# Altium PCB SuperFin GPIO Apps Board#1.PcbDoc
Units mil, origin at the board's own origin, x right, y up, seen from the top; angles counter-clockwise.
Board outline 3149.61 x 1673.23 mil, 2 copper layers (Top Layer, Bottom Layer); 6 components, 0 nets, 158 pads, 0 vias.
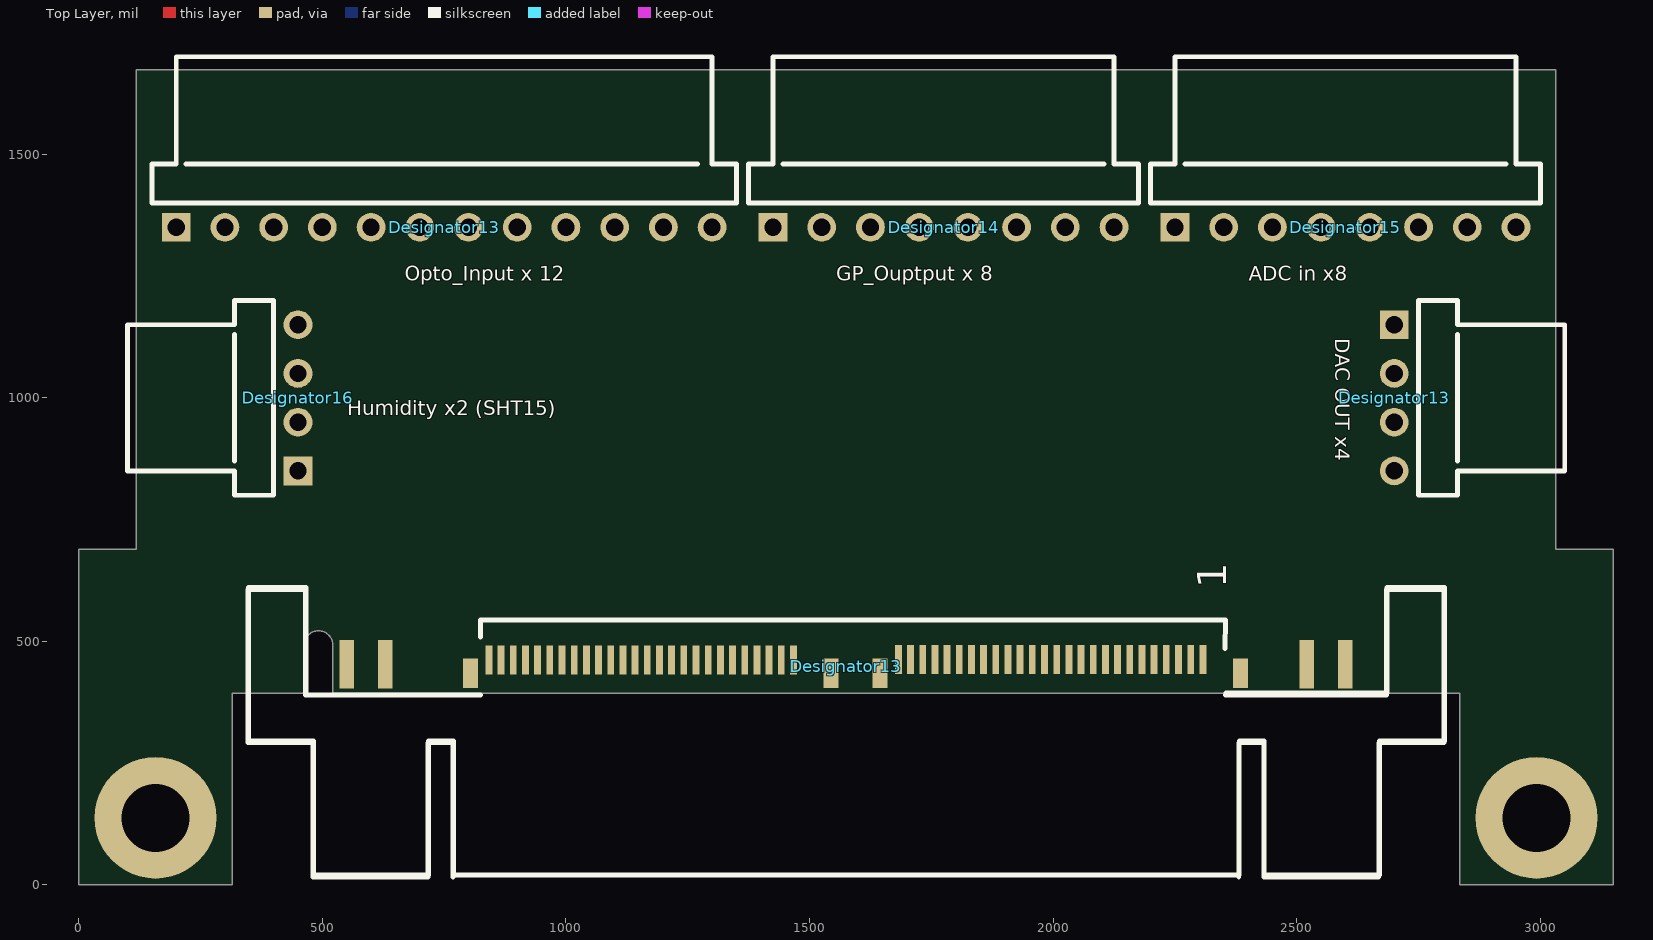
[diagram p0: Top Layer view]
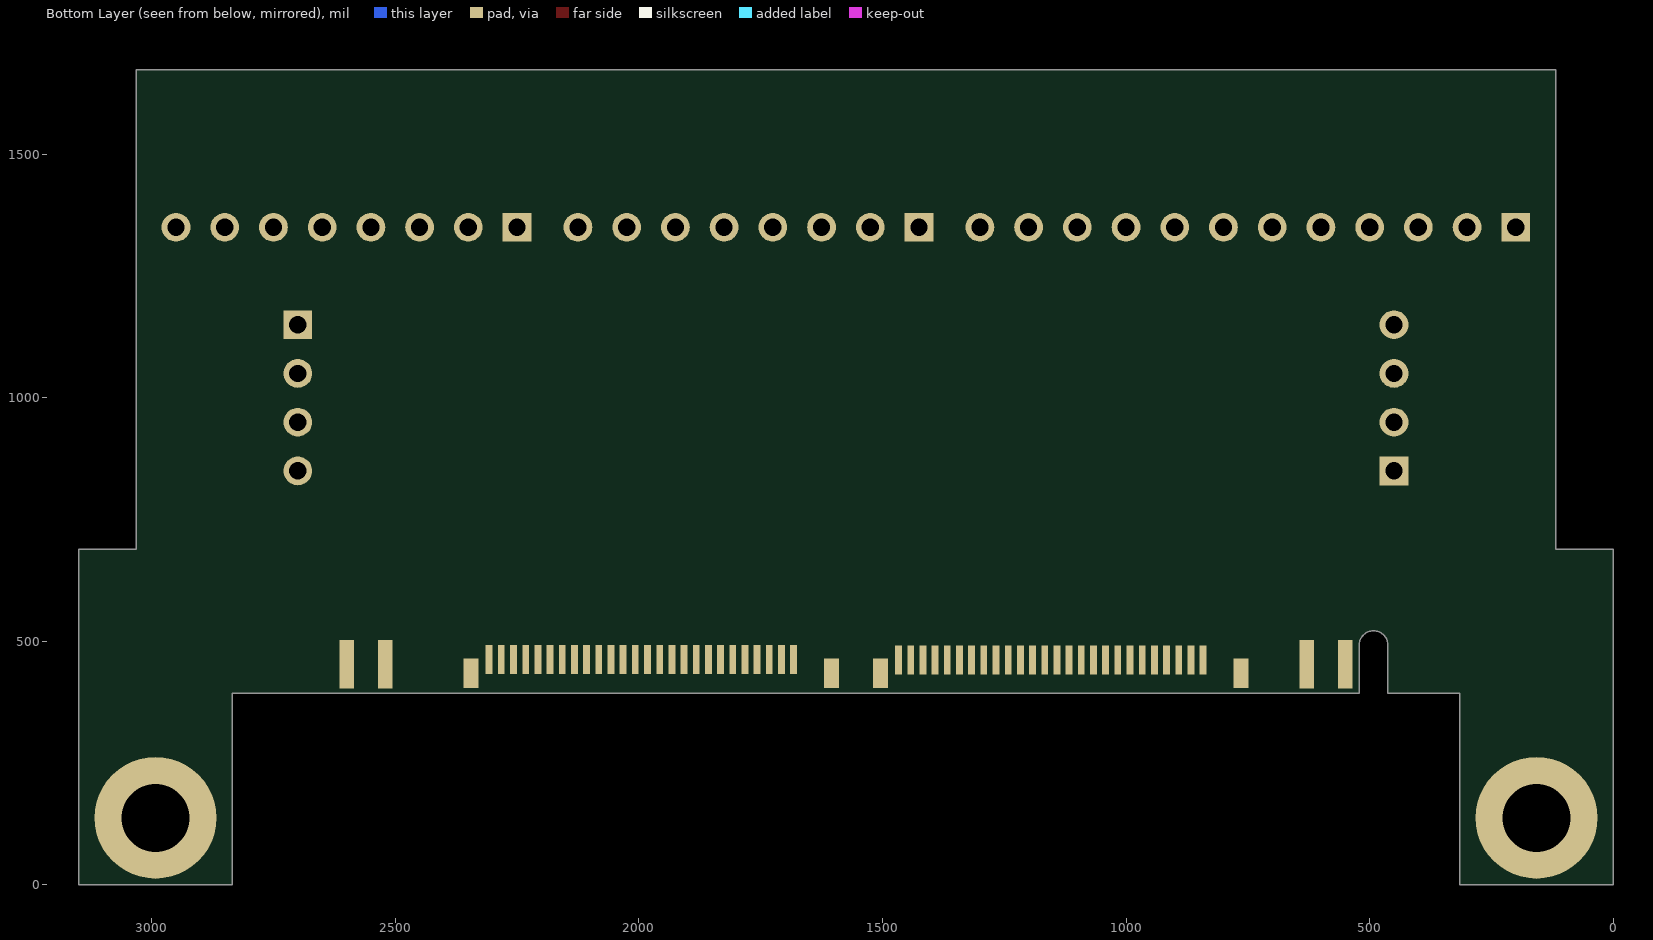
[diagram p1: Bottom Layer view, seen from below]

## Layer stack, top to bottom
Top Layer: signal copper 1.4
Dielectric: dielectric 12.6, FR-4, Dk 4.8
Bottom Layer: signal copper 1.4

## Board outline
0,0 0,688.98 118.11,688.98 118.11,1673.23 3031.5,1673.23 3031.5,688.98 3149.61,688.98 3149.61,0 2834.65,0 2834.65,393.7 521.55,393.7 521.55,492.13 ccw(c492.03,492.13) 462.5,492.13 462.5,393.7 314.96,393.7 314.96,0

## Design rules (kind name [scope] priority, off if disabled: settings)
Clearance [All] p1: gap=10
PolygonConnect [All] p1: connectstyle=Relief reliefconductorwidth=10 reliefentries=4 polygonreliefangle="90 Angle"
RoutingVias [All] p1: holewidth=28 width=50 viastyle="Through Hole" minholewidth=28 minwidth=50 maxholewidth=28 maxwidth=50
SilkscreenOverComponentPads [All] p1: minsilkscreentomaskgap=10
SolderMaskExpansion [All] p1: expansion=4
Width [All] p1: maxlimit=10 minlimit=10 preferedwidth=10
27 further rules are at their usual default settings.

## Components (designator, comment, footprint, x,y, rotation, side; value= is the part's Value field where it differs from the comment)
Designator13 "Comment" "HDR 1X4 RT for IDC" 2700,1150 r270 top
Designator13 "Comment" "HDR 1x12 RT for IDC" 200,1350 r0 top
Designator13 "Comment" "QMS EDGE PWR PINS - 104 PIN" 1574.8,393.7 r0 top
Designator14 "Comment" "HDR1X8 RT for IDC" 1425,1350 r0 top
Designator15 "Comment" "HDR1X8 RT for IDC" 2250,1350 r0 top
Designator16 "Comment" "HDR 1X4 RT for IDC" 450,850 r90 top

## Footprints (in the part's own frame and the unit in brackets; to place one, negate y for a bottom-side part, rotate by r counter-clockwise, add the part's x,y. Pads: shape width x height; smd on the part's side, far side on the other; paste and mask are expansions set on the pad)
"HDR1X8 RT for IDC" [mm] "Connector; Header; 8 Position, RT Angle"
  rect 1.5x1.5 hole 0.9: 1(0,0)
  round 1.5 hole 0.9: 2(2.54,0) 3(5.08,0) 4(7.62,0) 5(10.16,0) 6(12.7,0) 7(15.24,0) 8(17.78,0)
  silkscreen extent -1.27,1.27 19.05,8.89
"HDR 1X4 RT for IDC" [mm] "Connector; Header; RT angle 4 Position"
  rect 1.5x1.5 hole 0.9: 1(0,0)
  round 1.5 hole 0.9: 2(2.54,0) 3(5.08,0) 4(7.62,0)
  silkscreen extent -1.27,1.27 8.89,8.89
"HDR 1x12 RT for IDC" [mm]
  rect 1.5x1.5 hole 0.9: 1(0,0)
  round 1.5 hole 0.9: 2(2.54,0) 3(5.08,0) 4(7.62,0) 5(10.16,0) 6(12.7,0) 7(15.24,0) 8(17.78,0) 9(20.32,0) 10(22.86,0) 11(25.4,0) 12(27.94,0)
  silkscreen extent -1.27,1.27 29.21,8.89
"QMS EDGE PWR PINS - 104 PIN" [mil] "52 pos (104 pin) + 8 pwr pins"
  rect 14x60 smd: 0(132.45,69.15) 1(732.45,69.15) 3(707.45,69.15) 5(682.45,69.15) 7(657.45,69.15) 9(632.45,69.15) 11(607.45,69.15) 13(582.45,69.15) 15(557.45,69.15) 17(532.45,69.15) 19(507.45,69.15) 21(482.45,69.15) 23(457.45,69.15) 25(432.45,69.15) 27(407.45,69.15) 29(382.45,69.15) 31(357.45,69.15) 33(332.45,69.15) 35(307.45,69.15) 37(282.45,69.15) 39(257.45,69.15) 41(232.45,69.15) 43(207.45,69.15) 45(182.45,69.15) 47(157.45,69.15) 51(107.45,69.15) 53(-107.89,68.09) 55(-132.89,68.09) 57(-157.89,68.09) 59(-182.89,68.09) 61(-207.89,68.09) 63(-232.89,68.09) 65(-257.89,68.09) 67(-282.89,68.09) 69(-307.89,68.09) 71(-332.89,68.09) 73(-357.89,68.09) 75(-382.89,68.09) 77(-407.89,68.09) 79(-432.89,68.09) 81(-457.89,68.09) 83(-482.89,68.09) 85(-507.89,68.09) 87(-532.89,68.09) 89(-557.89,68.09) 91(-582.89,68.09) 93(-607.89,68.09) 95(-632.89,68.09) 97(-657.89,68.09) 99(-682.89,68.09) 101(-707.89,68.09) 103(-732.89,68.09)
  rect 14x60 smd far side: 2(732.45,69.15) 4(707.45,69.15) 6(682.45,69.15) 8(657.45,69.15) 10(632.45,69.15) 12(607.45,69.15) 14(582.45,69.15) 16(557.45,69.15) 18(532.45,69.15) 20(507.45,69.15) 22(482.45,69.15) 24(457.45,69.15) 26(432.45,69.15) 28(407.45,69.15) 30(382.45,69.15) 32(357.45,69.15) 34(332.45,69.15) 36(307.45,69.15) 38(282.45,69.15) 40(257.45,69.15) 42(232.45,69.15) 44(207.45,69.15) 46(182.45,69.15) 48(157.45,69.15) 50(132.45,69.15) 52(107.45,69.15) 54(-107.89,68.09) 56(-132.89,68.09) 58(-157.89,68.09) 60(-182.89,68.09) 62(-207.89,68.09) 64(-232.89,68.09) 66(-257.89,68.09) 68(-282.89,68.09) 70(-307.89,68.09) 72(-332.89,68.09) 74(-357.89,68.09) 76(-382.89,68.09) 78(-407.89,68.09) 80(-432.89,68.09) 82(-457.89,68.09) 84(-482.89,68.09) 86(-507.89,68.09) 88(-532.89,68.09) 90(-557.89,68.09) 92(-582.89,68.09) 94(-607.89,68.09) 96(-632.89,68.09) 98(-657.89,68.09) 100(-682.89,68.09) 102(-707.89,68.09) 104(-732.89,68.09)
  rect 31x60 smd: 105(809.45,41.09) 107(69.45,41.09) 109(-30.55,41.09) 111(-770.55,41.09)
  rect 31x60 smd far side: 106(769.45,41.09) 108(29.45,41.09) 110(-70.55,41.09) 112(-810.55,41.09)
  rect 30x100 smd: PC01(1024.45,59.65) PC03(945.55,59.65) PC05(-945.55,59.15) PC07(-1024.45,59.15)
  rect 30x100 smd far side: PC02(1024.45,59.65) PC04(945.55,59.65) PC06(-945.55,59.15) PC08(-1024.45,59.15)
  silkscreen extent -1228,-377 1229,217

## Free pads (board coordinates)
  round 250 hole 140 unplated: 0(157.48,137.8) 0(2992.13,137.8)

## Nets (pads, with @x,y where several pads share a name; then routed paths per layer and width w, separated by ;. In a path a pad name is that pad's centre, name@x,y a point inside that pad or via, vN(x,y) a via of type N, cw(c..) or ccw(c..) an arc to the next point about the centre after c; other vN are vias at no path point)
pads on no net: Designator13.0 Designator13.1 Designator13.2 Designator13.3 Designator13.4 Designator13.5 Designator13.6 Designator13.7 Designator13.8 Designator13.9 Designator13.10 Designator13.11 Designator13.12 Designator13.13 Designator13.14 Designator13.15 Designator13.16 Designator13.17 Designator13.18 Designator13.19 Designator13.20 Designator13.21 Designator13.22 Designator13.23 Designator13.24 Designator13.25 Designator13.26 Designator13.27 Designator13.28 Designator13.29 Designator13.30 Designator13.31 Designator13.32 Designator13.33 Designator13.34 Designator13.35 Designator13.36 Designator13.37 Designator13.38 Designator13.39 Designator13.40 Designator13.41 Designator13.42 Designator13.43 Designator13.44 Designator13.45 Designator13.46 Designator13.47 Designator13.48 Designator13.50 Designator13.51 Designator13.52 Designator13.53 Designator13.54 Designator13.55 Designator13.56 Designator13.57 Designator13.58 Designator13.59 Designator13.60 Designator13.61 Designator13.62 Designator13.63 Designator13.64 Designator13.65 Designator13.66 Designator13.67 Designator13.68 Designator13.69 Designator13.70 Designator13.71 Designator13.72 Designator13.73 Designator13.74 Designator13.75 Designator13.76 Designator13.77 Designator13.78 Designator13.79 Designator13.80 Designator13.81 Designator13.82 Designator13.83 Designator13.84 Designator13.85 Designator13.86 Designator13.87 Designator13.88 Designator13.89 Designator13.90 Designator13.91 Designator13.92 Designator13.93 Designator13.94 Designator13.95 Designator13.96 Designator13.97 Designator13.98 Designator13.99 Designator13.100 Designator13.101 Designator13.102 Designator13.103 Designator13.104 Designator13.105 Designator13.106 Designator13.107 Designator13.108 Designator13.109 Designator13.110 Designator13.111 Designator13.112 Designator13.PC01 Designator13.PC02 Designator13.PC03 Designator13.PC04 Designator13.PC05 Designator13.PC06 Designator13.PC07 Designator13.PC08 Designator14.1 Designator14.2 Designator14.3 Designator14.4 Designator14.5 Designator14.6 Designator14.7 Designator14.8 Designator15.1 Designator15.2 Designator15.3 Designator15.4 Designator15.5 Designator15.6 Designator15.7 Designator15.8 Designator16.1 Designator16.2 Designator16.3 Designator16.4

## Silkscreen, mask and mechanical layers (free items; w line width, h text height)
Top Overlay:
  text "Opto_Input x 12" at 669.29,1240.16 h30
  text "GP_Ouptput x 8" at 1555.12,1240.16 h30
  text "ADC in x8" at 2401.57,1240.16 h30
  text "DAC OUT x4" at 2578.74,1122.05 h30 r270
  text "Humidity x2 (SHT15)" at 551.18,964.57 h30
Mechanical 13:
  lines w10: 314.96,393.7 314.96,0 0,0 0,393.7 0,688.98 118.11,688.98 118.11,1673.23 3031.5,1673.23 3031.5,688.98 3149.61,688.98 3149.61,393.7 3149.61,0 2834.65,0 2834.65,393.7 1574.8,393.7 521.55,393.7

## Text inside footprints (layer, text, board x,y; h text height)
Designator13: Top Overlay "1" at 2354.8,608.82 h60 r90